# Altium PCB PCB3.PcbDoc
Units mm, origin at the board's own origin, x right, y up, seen from the top; angles counter-clockwise.
Board outline 152.4 x 101.6 mm, 2 copper layers (Top Layer, Bottom Layer); 54 components, 0 nets, 360 pads, 0 vias.
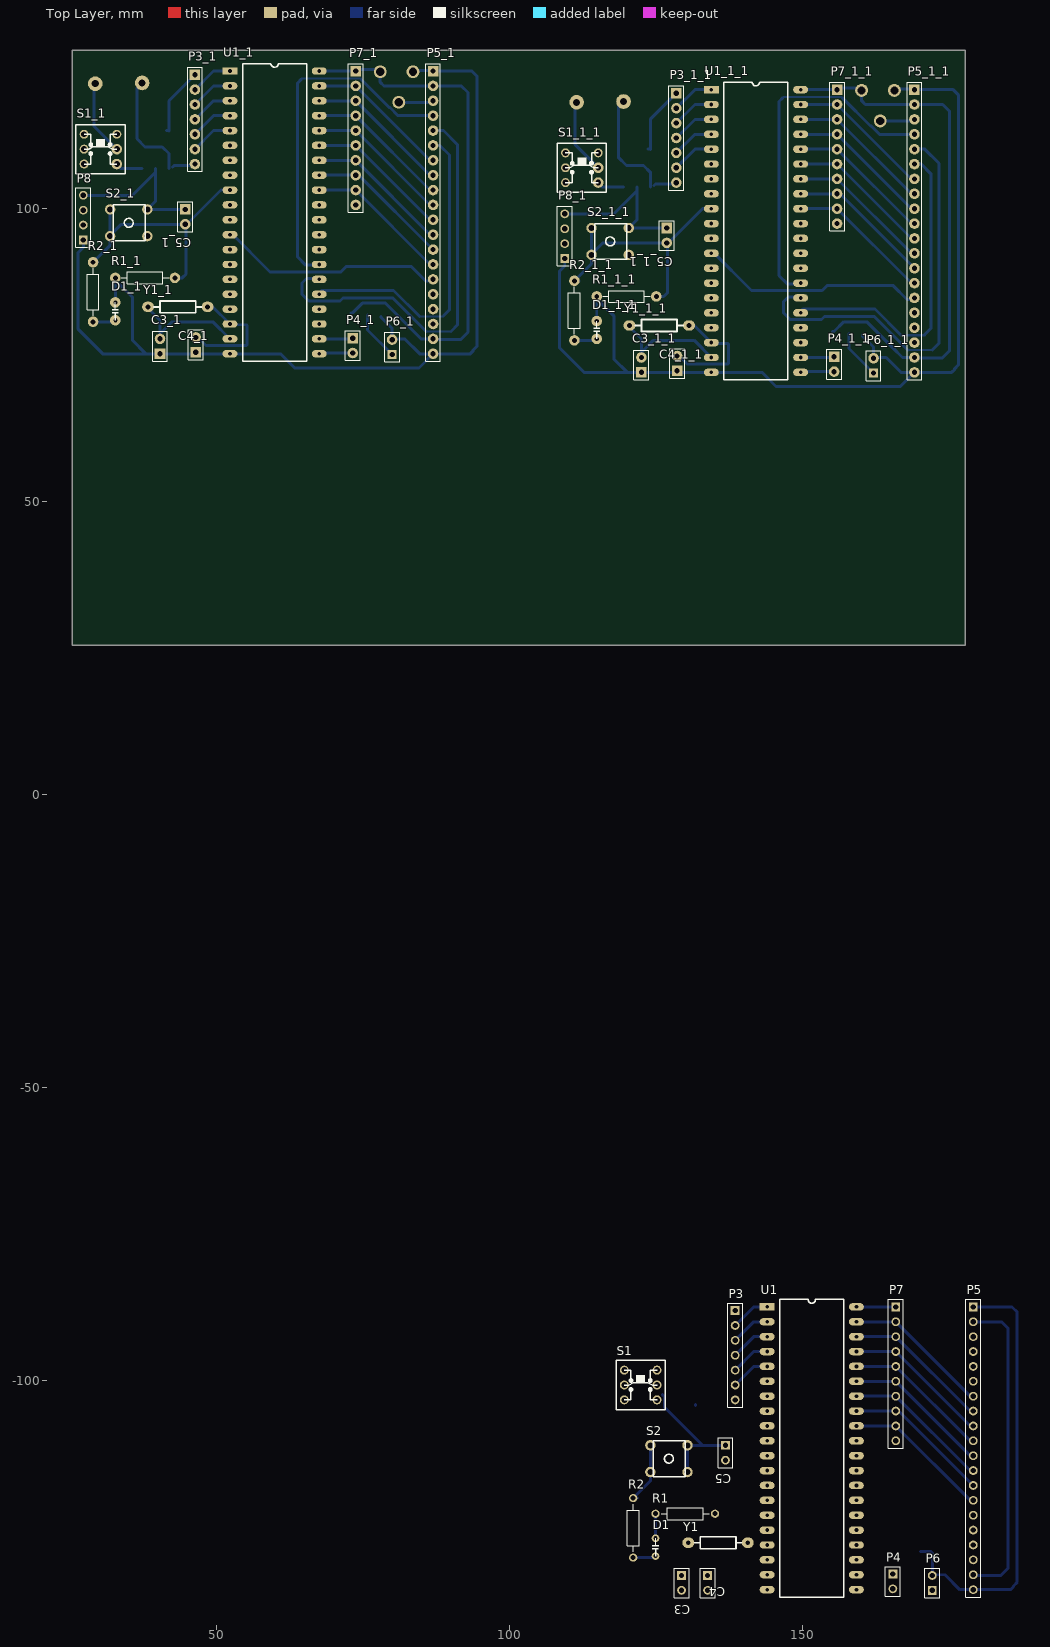
[diagram p0: Top Layer view]
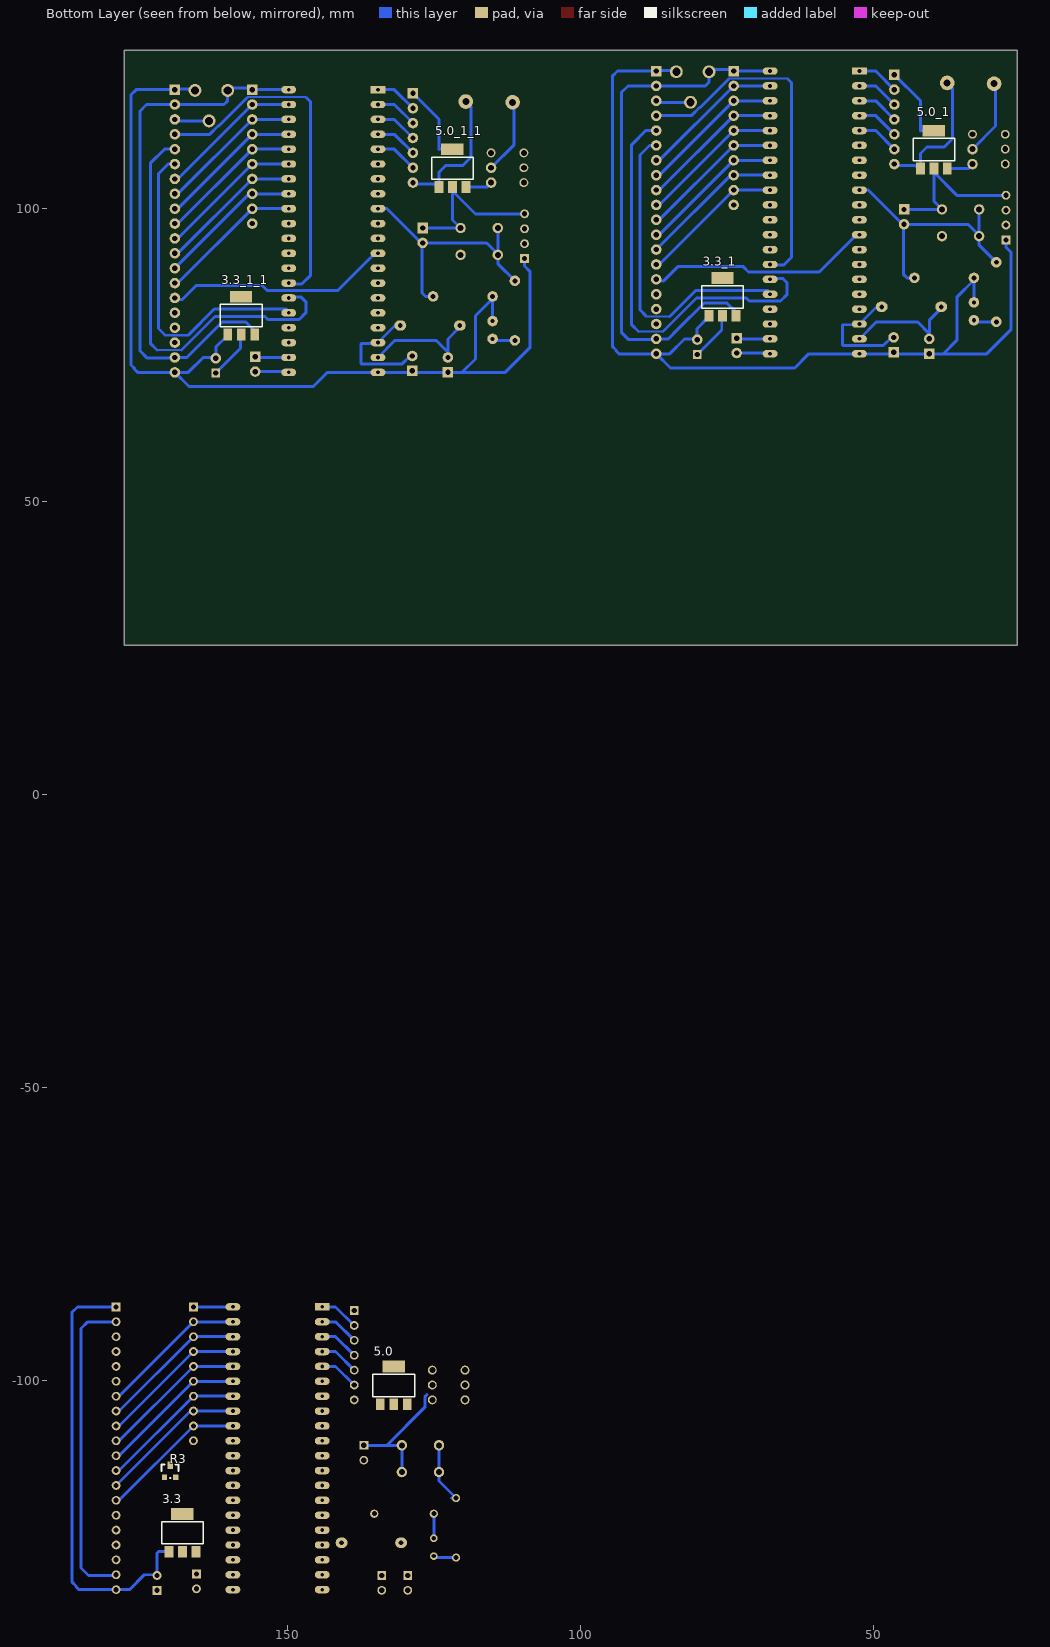
[diagram p1: Bottom Layer view, seen from below]

## Layer stack, top to bottom
Top Solder: solder mask 0.0102, Solder Resist, Dk 3.5
Top Layer: signal copper 0.0356
Dielectric 1: dielectric 0.32, FR-4, Dk 4.8
Bottom Layer: signal copper 0.0356
Bottom Solder: solder mask 0.0102, Solder Resist, Dk 3.5

## Board outline
25.4,25.4 177.8,25.4 177.8,127 25.4,127

## Design rules (kind name [scope] priority, off if disabled: settings)
Clearance [All] p1: gap=0.254
PolygonConnect [All] p1: connectstyle=Relief reliefconductorwidth=0.254 reliefentries=4 polygonreliefangle="90 Angle" airgapwidth=0.254
RoutingVias [All] p1: holewidth=0.711 width=1.27 viastyle="Through Hole" minholewidth=0.711 minwidth=1.27 maxholewidth=0.711 maxwidth=1.27
SolderMaskExpansion [All] p1: expansion=0.102
Width [All] p1: maxlimit=0.254 minlimit=0.254 preferedwidth=0.254
29 further rules are at their usual default settings.

## Components (designator, comment, footprint, x,y, rotation, side; value= is the part's Value field where it differs from the comment)
3.3 "ASM1117-3.3" SOT223 170.18,-129.286 r180 bottom
3.3_1 "ASM1117-3.3" SOT223 77.978,81.661 r180 bottom (schematic designator 3.3)
3.3_1_1 "ASM1117-3.3" SOT223 160.147,78.486 r180 bottom (schematic designator 3.3)
5.0 "ASM1117-5.0" SOT223 134.112,-104.14 r180 bottom
5.0_1 "ASM1117-5.0" SOT223 41.91,106.807 r180 bottom (schematic designator 5.0)
5.0_1_1 "ASM1117-5.0" SOT223 124.079,103.632 r180 bottom (schematic designator 5.0)
C3 "Cap" HDR1X2#1 129.413,-133.35 r270 top
C3_1 "Cap" HDR1X2#2 40.386,75.184 r90 top (schematic designator C3)
C3_1_1 "Cap" HDR1X2#2 122.555,72.009 r90 top (schematic designator C3)
C4 "Cap" HDR1X2#1 133.858,-133.35 r270 top
C4_1 "Cap" HDR1X2#2 46.482,75.438 r90 top (schematic designator C4)
C4_1_1 "Cap" HDR1X2#2 128.651,72.263 r90 top (schematic designator C4)
C5 "Cap Pol2" HDR1X2#1 136.906,-111.125 r270 top
C5_1 "Cap Pol2" HDR1X2#2 44.704,99.822 r270 top (schematic designator C5)
C5_1_1 "Cap Pol2" HDR1X2#2 126.873,96.647 r270 top (schematic designator C5)
D1 "LED1" CB1#1 124.968,-127 r270 top
D1_1 "LED1" CB1#2 32.766,83.947 r270 top (schematic designator D1)
D1_1_1 "LED1" CB1#2 114.935,80.772 r270 top (schematic designator D1)
P3 "KEY" HDR1X7#1 138.557,-88.138 r270 top
P3_1 "KEY" HDR1X7#2 46.355,122.809 r270 top (schematic designator P3)
P3_1_1 "KEY" HDR1X7#2 128.524,119.634 r270 top (schematic designator P3)
P4 "Header 2" HDR1X2#1 165.481,-133.096 r270 top
P4_1 "Header 2" HDR1X2#2 73.279,77.851 r270 top (schematic designator P4)
P4_1_1 "Header 2" HDR1X2#2 155.448,74.676 r270 top (schematic designator P4)
P5 "LCD12864" HDR1X20#1 179.197,-87.503 r270 top
P5_1 "LCD12864" HDR1X20#2 86.995,123.444 r270 top (schematic designator P5)
P5_1_1 "LCD12864" HDR1X20#2 169.164,120.269 r270 top (schematic designator P5)
P6 "FPGA_POWER" HDR1X2#1 172.212,-135.89 r90 top
P6_1 "FPGA_POWER" HDR1X2#3 80.01,75.057 r90 top (schematic designator P6)
P6_1_1 "FPGA_POWER" HDR1X2#3 162.179,71.882 r90 top (schematic designator P6)
P7 "排阻103" HDR1X10#1 165.989,-87.503 r270 top
P7_1 "排阻103" HDR1X10#2 73.787,123.444 r270 top (schematic designator P7)
P7_1_1 "排阻103" HDR1X10#2 155.956,120.269 r270 top (schematic designator P7)
P8 "ISP" HDR1X4 27.305,94.615 r90 top (schematic designator P7)
P8_1 "ISP" HDR1X4 109.474,91.44 r90 top (schematic designator P7)
R1 "Res2" AXIAL-0.4#1 130.048,-122.809 r180 top
R1_1 "Res2" AXIAL-0.4#2 37.846,88.138 r180 top (schematic designator R1)
R1_1_1 "Res2" AXIAL-0.4#2 120.015,84.963 r180 top (schematic designator R1)
R2 "Res2" AXIAL-0.4#1 121.158,-125.222 r90 top
R2_1 "Res2" AXIAL-0.4#2 28.956,85.725 r90 top (schematic designator R2)
R2_1_1 "Res2" AXIAL-0.4#2 111.125,82.55 r90 top (schematic designator R2)
R3 "Res Tap" SOT-23 169.926,-114.554 r180 bottom
S1 "SW-DPDT" AN88#1 122.428,-100.838 r0 top
S1_1 "SW-DPDT" AN88#2 30.226,110.109 r0 top (schematic designator S1)
S1_1_1 "SW-DPDT" AN88#2 112.395,106.934 r0 top (schematic designator S1)
S2 "SW-PB" AN66 127.254,-113.411 r90 top
S2_1 "SW-PB" AN66 35.052,97.536 r90 top (schematic designator S2)
S2_1_1 "SW-PB" AN66 117.221,94.361 r90 top (schematic designator S2)
U1 "P89C51X2BN" DIP40 144.018,-87.503 r0 top
U1_1 "P89C51X2BN" DIP40 52.324,123.444 r0 top (schematic designator U1)
U1_1_1 "P89C51X2BN" DIP40 134.493,120.269 r0 top (schematic designator U1)
Y1 "XTAL" AXIAL0.4 135.636,-127.762 r0 top
Y1_1 "XTAL" AXIAL0.4 43.434,83.185 r0 top (schematic designator Y1)
Y1_1_1 "XTAL" AXIAL0.4 125.603,80.01 r0 top (schematic designator Y1)

## Footprints (in the part's own frame and the unit in brackets; to place one, negate y for a bottom-side part, rotate by r counter-clockwise, add the part's x,y. Pads: shape width x height; smd on the part's side, far side on the other; paste and mask are expansions set on the pad)
AN66 [mil]
  round 70 hole 40: 1(-90,125) 1(90,125) 2(-90,-125) 2(90,-125)
  silkscreen extent -120,-110 120,105
AN88#1 [mil]
  round 60 hole 40: 1(-110,100) 2(-110,0) 3(-110,-100) 4(110,-100) 5(110,0) 6(110,100)
  silkscreen extent -165,-165 165,165
AN88#2 [mil]
  round 60 hole 40: 1(-110,100) 2(-110,0) 3(-110,-100) 6(110,100)
  round 70.87 hole 40: 4(110,-100) 5(110,0)
  silkscreen extent -165,-165 165,165
AXIAL0.4 [mil]
  oval 80x70 hole 32: 1(-200,0) 2(200,0)
  silkscreen extent -160,-40 160,40
AXIAL-0.4#1 [mm] "Axial Device, Thru-Hole; 2 Leads; 0.4 in Pin Spacing"
  round 1.4 hole 0.85: 1(-5.08,0) 2(5.08,0)
  silkscreen extent -4.06,-1.02 4.06,1.02
AXIAL-0.4#2 [mm] "Axial Device, Thru-Hole; 2 Leads; 0.4 in Pin Spacing"
  round 1.8 hole 0.85: 1(-5.08,0) 2(5.08,0)
  silkscreen extent -4.06,-1.02 4.06,1.02
CB1#1 [mm]
  round 1.3 hole 0.7: 1(0,0) 2(3.048,0)
  silkscreen extent 0,-0.55 3.05,0.52
CB1#2 [mm]
  round 1.8 hole 0.7: 1(0,0) 2(3.048,0)
  silkscreen extent 0,-0.55 3.05,0.52
DIP40 [mm]
  rect 2.54x1.27 hole 0.635: 1(0,0)
  oval 2.54x1.27 hole 0.635: 2(0,-2.54) 3(0,-5.08) 4(0,-7.62) 5(0,-10.16) 6(0,-12.7) 7(0,-15.24) 8(0,-17.78) 9(0,-20.32) 10(0,-22.86) 11(0,-25.4) 12(0,-27.94) 13(0,-30.48) 14(0,-33.02) 15(0,-35.56) 16(0,-38.1) 17(0,-40.64) 18(0,-43.18) 19(0,-45.72) 20(0,-48.26) 21(15.24,-48.26) 22(15.24,-45.72) 23(15.24,-43.18) 24(15.24,-40.64) 25(15.24,-38.1) 26(15.24,-35.56) 27(15.24,-33.02) 28(15.24,-30.48) 29(15.24,-27.94) 30(15.24,-25.4) 31(15.24,-22.86) 32(15.24,-20.32) 33(15.24,-17.78) 34(15.24,-15.24) 35(15.24,-12.7) 36(15.24,-10.16) 37(15.24,-7.62) 38(15.24,-5.08) 39(15.24,-2.54) 40(15.24,0)
  silkscreen extent 2.16,-49.53 13.08,1.27
HDR1X2#1 [mm] "Connector; Header; 2 Position"
  rect 1.5x1.5 hole 0.9: 1(0,0)
  round 1.5 hole 0.9: 2(2.54,0)
  silkscreen extent -1.27,-1.27 3.81,1.27
HDR1X2#2 [mm] "Connector; Header; 2 Position"
  rect 1.8x1.8 hole 0.9: 1(0,0)
  round 1.8 hole 0.9: 2(2.54,0)
  silkscreen extent -1.27,-1.27 3.81,1.27
HDR1X2#3 [mm] "Connector; Header; 2 Position"
  rect 1.5x1.5 hole 0.9: 1(0,0)
  round 1.8 hole 0.9: 2(2.54,0)
  silkscreen extent -1.27,-1.27 3.81,1.27
HDR1X4 [mm] "Connector; Header; 4 Position"
  rect 1.5x1.5 hole 0.9: 1(0,0)
  round 1.5 hole 0.9: 2(2.54,0) 3(5.08,0) 4(7.62,0)
  silkscreen extent -1.27,-1.27 8.89,1.27
HDR1X7#1 [mm] "Connector; Header; 7 Position"
  rect 1.5x1.5 hole 0.9: 1(0,0)
  round 1.5 hole 0.9: 2(2.54,0) 3(5.08,0) 4(7.62,0) 5(10.16,0) 6(12.7,0) 7(15.24,0)
  silkscreen extent -1.27,-1.27 16.51,1.27
HDR1X7#2 [mm] "Connector; Header; 7 Position"
  rect 1.8x1.8 hole 0.9: 1(0,0)
  round 1.8 hole 0.9: 2(2.54,0) 3(5.08,0) 4(7.62,0) 5(10.16,0) 6(12.7,0) 7(15.24,0)
  silkscreen extent -1.27,-1.27 16.51,1.27
HDR1X10#1 [mm] "Connector; Header; 10 Position"
  rect 1.5x1.5 hole 0.9: 1(0,0)
  round 1.5 hole 0.9: 2(2.54,0) 3(5.08,0) 4(7.62,0) 5(10.16,0) 6(12.7,0) 7(15.24,0) 8(17.78,0) 9(20.32,0) 10(22.86,0)
  silkscreen extent -1.27,-1.27 24.13,1.27
HDR1X10#2 [mm] "Connector; Header; 10 Position"
  rect 1.8x1.8 hole 0.9: 1(0,0)
  round 1.8 hole 0.9: 2(2.54,0) 3(5.08,0) 4(7.62,0) 5(10.16,0) 6(12.7,0) 7(15.24,0) 8(17.78,0) 9(20.32,0) 10(22.86,0)
  silkscreen extent -1.27,-1.27 24.13,1.27
HDR1X20#1 [mm] "Connector; Header; 20 Position"
  rect 1.5x1.5 hole 0.9: 1(0,0)
  round 1.5 hole 0.9: 2(2.54,0) 3(5.08,0) 4(7.62,0) 5(10.16,0) 6(12.7,0) 7(15.24,0) 8(17.78,0) 9(20.32,0) 10(22.86,0) 11(25.4,0) 12(27.94,0) 13(30.48,0) 14(33.02,0) 15(35.56,0) 16(38.1,0) 17(40.64,0) 18(43.18,0) 19(45.72,0) 20(48.26,0)
  silkscreen extent -1.27,-1.27 49.53,1.27
HDR1X20#2 [mm] "Connector; Header; 20 Position"
  rect 1.8x1.8 hole 0.9: 1(0,0)
  round 1.8 hole 0.9: 2(2.54,0) 3(5.08,0) 4(7.62,0) 5(10.16,0) 6(12.7,0) 7(15.24,0) 8(17.78,0) 9(20.32,0) 10(22.86,0) 11(25.4,0) 12(27.94,0) 13(30.48,0) 14(33.02,0) 15(35.56,0) 16(38.1,0) 17(40.64,0) 18(43.18,0) 19(45.72,0) 20(48.26,0)
  silkscreen extent -1.27,-1.27 49.53,1.27
SOT223 [mil]
  rect 59x79 smd: 1(0,0) 2(90.55,0) 3(181.1,0)
  rect 150x79 smd: 4(89.88,253.54)
  silkscreen extent -49,52 231,202
SOT-23 [mil]
  rect 36x50 smd: 1(-2,0)
  rect 36x36 smd: 2(-40,-80) 3(35,-80)
  silkscreen extent -60,-85 55,5

## Part data
3.3 3.3_1 3.3_1_1 5.0 5.0_1 5.0_1_1: library part ASM1117
C3 C3_1 C3_1_1 C4 C4_1 C4_1_1: "Capacitor"
C5 C5_1 C5_1_1: "Polarized Capacitor (Axial)"
D1 D1_1 D1_1_1: "Typical RED GaAs LED"
P3 P3_1 P3_1_1: library part "Header 7", "Header, 7-Pin"
P4 P4_1 P4_1_1: "Header, 2-Pin"
P5 P5_1 P5_1_1: library part "Header 20", "Header, 20-Pin"
P6 P6_1 P6_1_1: library part "Header 2", "Header, 2-Pin"
P7 P7_1 P7_1_1: library part "Header 10", "Header, 10-Pin"
P8 P8_1: library part "Header 4", "Header, 4-Pin"
R1 R1_1 R1_1_1 R2 R2_1 R2_1_1: "Resistor"
R3: "Tapped Resistor"
S1 S1_1 S1_1_1: "Double-Pole, Double-Throw Switch"
S2 S2_1 S2_1_1: "Switch"
U1 U1_1 U1_1_1: "80C51 8-Bit Flash Microcontroller Family, 4 kB Flash"
Y1 Y1_1 Y1_1_1: "Crystal Oscillator"

## Free pads (board coordinates)
  round 2.2 hole 1.4: 1(81.153,118.11) 1(163.322,114.935) 2(77.978,123.317) 2(160.147,120.142) 3(83.566,123.317) 3(165.735,120.142)
  round 2.5 hole 1.2: 4(29.337,121.285) 4(111.506,118.11) 5(37.338,121.412) 5(119.507,118.237)

## Nets (pads, with @x,y where several pads share a name; then routed paths per layer and width w, separated by ;. In a path a pad name is that pad's centre, name@x,y a point inside that pad or via, vN(x,y) a via of type N, cw(c..) or ccw(c..) an arc to the next point about the centre after c; other vN are vias at no path point)
pads on no net: 3.3.1 3.3.2 3.3.3 3.3.4 3.3_1.1 3.3_1.2 3.3_1.3 3.3_1.4 3.3_1_1.1 3.3_1_1.2 3.3_1_1.3 3.3_1_1.4 5.0.1 5.0.2 5.0.3 5.0.4 5.0_1.1 5.0_1.2 5.0_1.3 5.0_1.4 5.0_1_1.1 5.0_1_1.2 5.0_1_1.3 5.0_1_1.4 C3.1 C3.2 C3_1.1 C3_1.2 C3_1_1.1 C3_1_1.2 C4.1 C4.2 C4_1.1 C4_1.2 C4_1_1.1 C4_1_1.2 C5.1 C5.2 C5_1.1 C5_1.2 C5_1_1.1 C5_1_1.2 D1.1 D1.2 D1_1.1 D1_1.2 D1_1_1.1 D1_1_1.2 P3.1 P3.2 P3.3 P3.4 P3.5 P3.6 P3.7 P3_1.1 P3_1.2 P3_1.3 P3_1.4 P3_1.5 P3_1.6 P3_1.7 P3_1_1.1 P3_1_1.2 P3_1_1.3 P3_1_1.4 P3_1_1.5 P3_1_1.6 P3_1_1.7 P4.1 P4.2 P4_1.1 P4_1.2 P4_1_1.1 P4_1_1.2 P5.1 P5.2 P5.3 P5.4 P5.5 P5.6 P5.7 P5.8 P5.9 P5.10 P5.11 P5.12 P5.13 P5.14 P5.15 P5.16 P5.17 P5.18 P5.19 P5.20 P5_1.1 P5_1.2 P5_1.3 P5_1.4 P5_1.5 P5_1.6 P5_1.7 P5_1.8 P5_1.9 P5_1.10 P5_1.11 P5_1.12 P5_1.13 P5_1.14 P5_1.15 P5_1.16 P5_1.17 P5_1.18 P5_1.19 P5_1.20 P5_1_1.1 P5_1_1.2 P5_1_1.3 P5_1_1.4 P5_1_1.5 P5_1_1.6 P5_1_1.7 P5_1_1.8 P5_1_1.9 P5_1_1.10 P5_1_1.11 P5_1_1.12 P5_1_1.13 P5_1_1.14 P5_1_1.15 P5_1_1.16 P5_1_1.17 P5_1_1.18 P5_1_1.19 P5_1_1.20 P6.1 P6.2 P6_1.1 P6_1.2 P6_1_1.1 P6_1_1.2 P7.1 P7.2 P7.3 P7.4 P7.5 P7.6 P7.7 P7.8 P7.9 P7.10 P7_1.1 P7_1.2 P7_1.3 P7_1.4 P7_1.5 P7_1.6 P7_1.7 P7_1.8 P7_1.9 P7_1.10 P7_1_1.1 P7_1_1.2 P7_1_1.3 P7_1_1.4 P7_1_1.5 P7_1_1.6 P7_1_1.7 P7_1_1.8 P7_1_1.9 P7_1_1.10 P8.1 P8.2 P8.3 P8.4 P8_1.1 P8_1.2 P8_1.3 P8_1.4 R1.1 R1.2 R1_1.1 R1_1.2 R1_1_1.1 R1_1_1.2 R2.1 R2.2 R2_1.1 R2_1.2 R2_1_1.1 R2_1_1.2 R3.1 R3.2 R3.3 S1.1 S1.2 S1.3 S1.4 S1.5 S1.6 S1_1.1 S1_1.2 S1_1.3 S1_1.4 S1_1.5 S1_1.6 S1_1_1.1 S1_1_1.2 S1_1_1.3 S1_1_1.4 S1_1_1.5 S1_1_1.6 S2.1 S2.2 S2_1.1 S2_1.2 S2_1_1.1 S2_1_1.2 U1.1 U1.2 U1.3 U1.4 U1.5 U1.6 U1.7 U1.8 U1.9 U1.10 U1.11 U1.12 U1.13 U1.14 U1.15 U1.16 U1.17 U1.18 U1.19 U1.20 U1.21 U1.22 U1.23 U1.24 U1.25 U1.26 U1.27 U1.28 U1.29 U1.30 U1.31 U1.32 U1.33 U1.34 U1.35 U1.36 U1.37 U1.38 U1.39 U1.40 U1_1.1 U1_1.2 U1_1.3 U1_1.4 U1_1.5 U1_1.6 U1_1.7 U1_1.8 U1_1.9 U1_1.10 U1_1.11 U1_1.12 U1_1.13 U1_1.14 U1_1.15 U1_1.16 U1_1.17 U1_1.18 U1_1.19 U1_1.20 U1_1.21 U1_1.22 U1_1.23 U1_1.24 U1_1.25 U1_1.26 U1_1.27 U1_1.28 U1_1.29 U1_1.30 U1_1.31 U1_1.32 U1_1.33 U1_1.34 U1_1.35 U1_1.36 U1_1.37 U1_1.38 U1_1.39 U1_1.40 U1_1_1.1 U1_1_1.2 U1_1_1.3 U1_1_1.4 U1_1_1.5 U1_1_1.6 U1_1_1.7 U1_1_1.8 U1_1_1.9 U1_1_1.10 U1_1_1.11 U1_1_1.12 U1_1_1.13 U1_1_1.14 U1_1_1.15 U1_1_1.16 U1_1_1.17 U1_1_1.18 U1_1_1.19 U1_1_1.20 U1_1_1.21 U1_1_1.22 U1_1_1.23 U1_1_1.24 U1_1_1.25 U1_1_1.26 U1_1_1.27 U1_1_1.28 U1_1_1.29 U1_1_1.30 U1_1_1.31 U1_1_1.32 U1_1_1.33 U1_1_1.34 U1_1_1.35 U1_1_1.36 U1_1_1.37 U1_1_1.38 U1_1_1.39 U1_1_1.40 Y1.1 Y1.2 Y1_1.1 Y1_1.2 Y1_1_1.1 Y1_1_1.2
copper on no net: | length 2266.8
  Bottom Layer w0.254: 33.02,110.109 33.147,110.109 ; 115.189,106.934 115.316,106.934
  Bottom Layer w0.3: 64.516,122.047 64.643,122.174 74.549,122.174 74.676,122.047 ; 146.685,118.872 146.812,118.999 156.718,118.999 156.845,118.872
  Bottom Layer w0.4: 84.709,81.534 88.773,81.534 ; 86.106,78.994 90.043,78.994 ; 166.878,78.359 170.942,78.359 ; 168.275,75.819 172.212,75.819
  Bottom Layer w0.508: 27.305,94.615 27.305,93.345 26.416,92.456 26.416,79.375 30.607,75.184 38.227,75.184 ; 27.305,102.235 35.687,102.235 39.61,106.158 39.61,106.807 39.61,101.205 38.227,99.822 40.767,99.822 44.704,99.822 ; 28.956,80.645 32.512,80.645 32.766,80.899 33.401,80.899 ; 29.21,121.285 29.337,121.158 ; 29.337,121.539 29.337,121.158 ; 29.718,90.805 28.956,90.805 31.877,93.726 31.877,95.25 31.877,99.822 ; 31.75,95.25 33.782,97.282 44.704,97.282 ; 32.766,83.947 32.766,88.138 32.766,87.757 35.687,84.836 35.687,77.47 37.973,75.184 40.386,75.184 45.974,75.184 52.07,75.184 60.96,75.184 63.373,72.771 84.582,72.771 86.995,75.184 ; 33.02,107.315 33.02,107.442 33.655,106.807 37.31,106.807 ; 33.02,110.109 29.083,114.046 29.083,120.904 29.337,121.158 ; 37.592,121.412 37.338,121.412 36.449,120.523 36.449,111.887 37.846,110.49 40.767,110.49 41.91,109.347 41.91,106.807 ; 38.354,82.931 40.386,80.899 40.386,77.724 ; 40.386,78.232 40.386,78.613 42.418,80.645 49.403,80.645 52.324,77.724 ; 41.529,113.284 41.876,113.284 ; 41.913,113.247 41.913,118.367 46.355,122.809 ; 42.545,107.061 42.799,107.315 46.228,107.315 ; 42.672,88.138 44.196,88.138 44.831,88.773 44.831,97.155 50.8,103.124 52.324,103.124 ; 46.355,110.109 49.53,113.284 51.816,113.284 ; 46.355,112.649 49.53,115.824 51.816,115.824 ; 46.355,115.189 49.53,118.364 51.816,118.364 ; 46.355,117.729 49.53,120.904 51.816,120.904 ; 46.355,120.269 49.53,123.444 51.816,123.444 ; 46.863,77.978 48.26,76.581 55.118,76.581 55.245,76.708 55.245,80.01 55.118,80.137 52.451,80.137 52.578,80.137 ; 48.514,83.185 49.403,83.185 52.324,80.264 ; 52.578,95.758 59.182,89.154 71.247,89.154 72.136,90.043 83.312,90.043 85.725,87.63 86.868,87.63 ; 64.516,122.047 63.881,121.412 63.881,91.694 65.278,90.297 67.31,90.297 ; 67.056,103.124 73.787,103.124 86.487,90.424 ; 67.056,105.664 73.787,105.664 74.295,105.664 86.995,92.964 ; 67.056,108.204 73.787,108.204 86.487,95.504 ; 67.056,110.744 73.787,110.744 86.487,98.044 ; 67.056,113.284 73.787,113.284 86.741,100.33 ; 67.056,115.824 73.787,115.824 86.487,103.124 ; 67.056,118.364 73.787,118.364 86.487,105.664 ; 67.056,120.904 73.787,120.904 86.487,108.204 ; 67.056,123.444 73.787,123.444 ; 67.31,85.344 67.945,85.979 80.264,85.979 84.709,81.534 ; 67.564,77.724 73.152,77.724 73.279,77.851 ; 67.945,75.311 67.31,75.311 73.279,75.311 ; 67.945,88.011 65.405,88.011 64.643,87.249 64.643,85.344 65.786,84.201 71.12,84.201 71.628,84.709 80.137,84.709 85.852,78.994 ; 73.025,82.169 73.279,82.169 74.93,83.82 78.867,83.82 83.312,79.375 84.963,77.724 86.995,77.724 87.122,77.597 91.694,77.597 92.964,78.867 92.964,119.761 91.821,120.904 86.995,120.904 ; 73.914,123.698 75.946,123.698 77.597,123.698 77.978,123.317 77.978,121.539 78.613,120.904 86.614,120.904 ; 74.676,122.047 79.502,117.221 79.629,117.221 81.026,115.824 86.995,115.824 ; 75.819,80.772 75.819,81.788 75.819,79.248 80.01,75.057 ; 78.105,81.534 78.105,81.407 80.01,79.502 80.01,77.597 ; 79.756,77.343 80.137,77.724 82.169,77.724 84.709,75.184 86.995,75.184 ; 81.153,118.11 86.741,118.11 86.995,118.364 ; 83.693,123.571 86.868,123.571 86.995,123.444 93.599,123.444 94.488,122.555 94.488,76.454 93.853,75.819 93.853,75.692 93.345,75.184 86.995,75.184 ; 86.741,121.031 86.995,121.285 86.995,121.412 ; 86.995,110.744 88.138,110.744 89.789,109.093 89.789,82.677 88.773,81.661 ; 86.995,113.284 88.773,113.284 91.186,110.871 91.186,91.44 91.186,80.137 90.043,78.994 ; 109.474,91.44 109.474,90.17 108.585,89.281 108.585,76.2 112.776,72.009 120.396,72.009 ; 109.474,99.06 117.856,99.06 121.779,102.983 121.779,103.632 121.779,98.03 120.396,96.647 122.936,96.647 126.873,96.647 ; 111.125,77.47 114.681,77.47 114.935,77.724 115.57,77.724 ; 111.379,118.11 111.506,117.983 ; 111.506,118.364 111.506,117.983 ; 111.887,87.63 111.125,87.63 114.046,90.551 114.046,92.075 114.046,96.647 ; 113.919,92.075 115.951,94.107 126.873,94.107 ; 114.935,80.772 114.935,84.963 114.935,84.582 117.856,81.661 117.856,74.295 120.142,72.009 122.555,72.009 128.143,72.009 134.239,72.009 143.129,72.009 145.542,69.596 166.751,69.596 169.164,72.009 ; 115.189,104.14 115.189,104.267 115.824,103.632 119.479,103.632 ; 115.189,106.934 111.252,110.871 111.252,117.729 111.506,117.983 ; 119.761,118.237 119.507,118.237 118.618,117.348 118.618,108.712 120.015,107.315 122.936,107.315 124.079,106.172 124.079,103.632 ; 120.523,79.756 122.555,77.724 122.555,74.549 ; 121.158,-130.302 124.714,-130.302 124.968,-130.048 ; 121.92,-120.142 121.158,-120.142 124.079,-117.221 124.079,-115.697 124.079,-111.125 ; 122.555,75.057 122.555,75.438 124.587,77.47 131.572,77.47 134.493,74.549 ; 123.698,110.109 124.045,110.109 ; 124.082,110.072 124.082,115.192 128.524,119.634 ; 124.714,103.886 124.968,104.14 128.397,104.14 ; 124.841,84.963 126.365,84.963 127,85.598 127,93.98 132.969,99.949 134.493,99.949 ; 124.968,-127 124.968,-122.809 ; 126.12,-102.48 126.492,-102.852 126.492,-104.648 132.969,-111.125 ; 128.524,106.934 131.699,110.109 133.985,110.109 ; 128.524,109.474 131.699,112.649 133.985,112.649 ; 128.524,112.014 131.699,115.189 133.985,115.189 ; 128.524,114.554 131.699,117.729 133.985,117.729 ; 128.524,117.094 131.699,120.269 133.985,120.269 ; 129.032,74.803 130.429,73.406 137.287,73.406 137.414,73.533 137.414,76.835 137.287,76.962 134.62,76.962 134.747,76.962 ; 130.429,-115.697 130.429,-111.125 132.969,-111.125 ; 130.683,80.01 131.572,80.01 134.493,77.089 ; 131.812,-104.311 131.812,-104.14 ; 134.747,92.583 141.351,85.979 153.416,85.979 154.305,86.868 165.481,86.868 167.894,84.455 169.037,84.455 ; 136.906,-111.125 132.969,-111.125 ; 138.557,-100.838 141.732,-97.663 144.018,-97.663 ; 138.557,-98.298 141.732,-95.123 144.018,-95.123 ; 138.557,-95.758 141.732,-92.583 144.018,-92.583 ; 138.557,-93.218 141.732,-90.043 144.018,-90.043 ; 138.557,-90.678 141.732,-87.503 144.018,-87.503 ; 146.685,118.872 146.05,118.237 146.05,88.519 147.447,87.122 149.479,87.122 ; 149.225,99.949 155.956,99.949 168.656,87.249 ; 149.225,102.489 155.956,102.489 156.464,102.489 169.164,89.789 ; 149.225,105.029 155.956,105.029 168.656,92.329 ; 149.225,107.569 155.956,107.569 168.656,94.869 ; 149.225,110.109 155.956,110.109 168.91,97.155 ; 149.225,112.649 155.956,112.649 168.656,99.949 ; 149.225,115.189 155.956,115.189 168.656,102.489 ; 149.225,117.729 155.956,117.729 168.656,105.029 ; 149.225,120.269 155.956,120.269 ; 149.479,82.169 150.114,82.804 162.433,82.804 166.878,78.359 ; 149.733,74.549 155.321,74.549 155.448,74.676 ; 150.114,72.136 149.479,72.136 155.448,72.136 ; 150.114,84.836 147.574,84.836 146.812,84.074 146.812,82.169 147.955,81.026 153.289,81.026 153.797,81.534 162.306,81.534 168.021,75.819 ; 155.194,78.994 155.448,78.994 157.099,80.645 161.036,80.645 165.481,76.2 167.132,74.549 169.164,74.549 169.291,74.422 173.863,74.422 175.133,75.692 175.133,116.586 173.99,117.729 169.164,117.729 ; 156.083,120.523 158.115,120.523 159.766,120.523 160.147,120.142 160.147,118.364 160.782,117.729 168.783,117.729 ; 156.845,118.872 161.671,114.046 161.798,114.046 163.195,112.649 169.164,112.649 ; 157.988,77.597 157.988,78.613 157.988,76.073 162.179,71.882 ; 159.258,-107.823 165.989,-107.823 178.689,-120.523 ; 159.258,-105.283 165.989,-105.283 166.497,-105.283 179.197,-117.983 ; 159.258,-102.743 165.989,-102.743 178.689,-115.443 ; 159.258,-100.203 165.989,-100.203 178.689,-112.903 ; 159.258,-97.663 165.989,-97.663 178.943,-110.617 ; 159.258,-95.123 165.989,-95.123 178.689,-107.823 ; 159.258,-92.583 165.989,-92.583 178.689,-105.283 ; 159.258,-90.043 165.989,-90.043 178.689,-102.743 ; 159.258,-87.503 165.989,-87.503 ; 160.274,78.359 160.274,78.232 162.179,76.327 162.179,74.422 ; 161.925,74.168 162.306,74.549 164.338,74.549 166.878,72.009 169.164,72.009 ; 163.322,114.935 168.91,114.935 169.164,115.189 ; 165.862,120.396 169.037,120.396 169.164,120.269 175.768,120.269 176.657,119.38 176.657,73.279 176.022,72.644 176.022,72.517 175.514,72.009 169.164,72.009 ; 168.91,117.856 169.164,118.11 169.164,118.237 ; 169.164,107.569 170.307,107.569 171.958,105.918 171.958,79.502 170.942,78.486 ; 169.164,110.109 170.942,110.109 173.355,107.696 173.355,88.265 173.355,76.962 172.212,75.819 ; 170.18,-129.286 171.958,-129.286 172.212,-129.54 172.212,-133.35 172.339,-133.223 174.371,-133.223 176.911,-135.763 179.197,-135.763 185.547,-135.763 186.055,-135.255 186.055,-135.128 186.69,-134.493 186.69,-88.392 185.801,-87.503 179.197,-87.503 ; 179.197,-133.223 179.324,-133.35 183.896,-133.35 185.166,-132.08 185.166,-91.186 184.023,-90.043 179.197,-90.043